# Altium PCB Tray3.PcbDoc
Units mm, origin at the board's own origin, x right, y up, seen from the top; angles counter-clockwise.
Board outline 120.02 x 29.97 mm, 2 copper layers (Top Layer, Bottom Layer); 13 components, 11 nets, 73 pads, 12 vias.
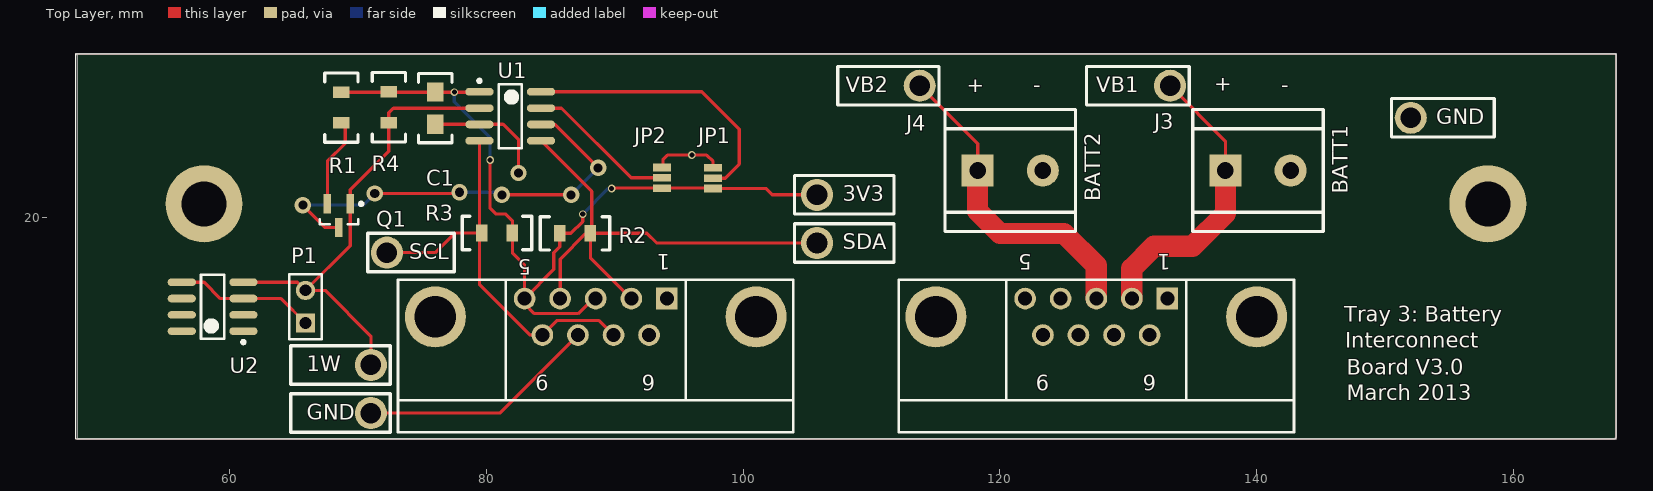
[diagram p0: Top Layer view]
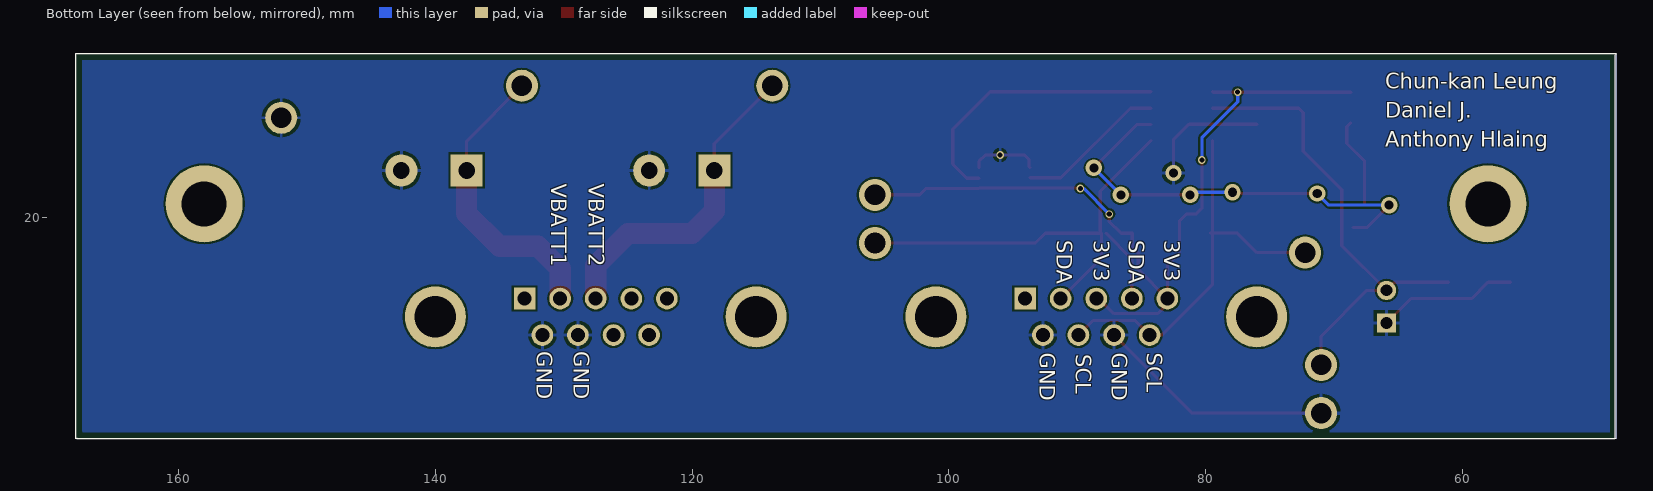
[diagram p1: Bottom Layer view, seen from below]

## Layer stack, top to bottom
Top Layer: signal copper 0.0356
Dielectric: dielectric 0.32, FR-4, Dk 4.8
Bottom Layer: signal copper 0.0356

## Board outline
48,32.722 48.127,32.595 48.127,2.75 167.888,2.75 168.015,2.877 168.015,32.722

## Design rules (kind name [scope] priority, off if disabled: settings)
Clearance [All] p1: gap=0.152
HoleSize [All] p1: absolutevalues=TRUE maxlimit=3.556 minlimit=0.025 maxpercent=80.000 minpercent=20.000
MinimumSolderMaskSliver [All] p1: minsoldermaskwidth=0.152
PolygonConnect [All] p1: connectstyle=Relief reliefconductorwidth=0.254 reliefentries=4 polygonreliefangle="90 Angle" airgapwidth=0.254
RoutingVias [All] p1: holewidth=0.711 width=1.27 viastyle="Through Hole" minholewidth=0.711 minwidth=1.27 maxholewidth=0.711 maxwidth=1.27
SilkToSilkClearance [All] p1: silktosilkclearance=0.051
SilkToSolderMaskClearance SilkscreenOverComponentPads [IsPad] p1: minsilkscreentomaskgap=0.254 clearancetoexposedcopper=TRUE
SolderMaskExpansion [All] p1: expansion=0.102
Width [All] p1: maxlimit=2.54 minlimit=0.254 preferedwidth=0.254
24 further rules are at their usual default settings.

## Classes and differential pairs
component class Designator: U2
component class Tray3: J3 J4

## Components (designator, comment, footprint, x,y, rotation, side; value= is the part's Value field where it differs from the comment)
C1 "0805 Cap" "0805 Cap" 76.012,28.505 r270 top
J3 "2 Pin terminal Block" "5.05mm Terminal Block - 2" 140.1,23.65 r0 top
J4 "2 Pin terminal Block" "5.05mm Terminal Block - 2" 120.8,23.65 r0 top
JP1 "Jumper Select" SOLDER_JUMPER_3_A 97.85,23.25 r270 top
JP2 "Jumper Select" SOLDER_JUMPER_3_A 93.875,23.275 r270 top
P1 "Header 2" HDR1X2 65.907,11.767 r90 top
Q1 "DMP2004K" DMP2004KDITR-ND 68.5,20.15 r270 top
R1 "0805 Resistor" "0805 Resistor" 68.7,28.55 r270 top
R2 "0805 Resistor" "0805 Resistor" 86.9,18.75 r0 top
R3 "0805 Resistor" "0805 Resistor" 80.825,18.775 r180 top
R4 "0603 Resistor" "0805 Resistor" 72.4,28.575 r270 top
U1 "DS24820Z+_ND" DS2482-100 81.854,27.87 r0 top
U2 "TO-92" DS18S20 58.668,13.037 r180 top

## Footprints (in the part's own frame and the unit in brackets; to place one, negate y for a bottom-side part, rotate by r counter-clockwise, add the part's x,y. Pads: shape width x height; smd on the part's side, far side on the other; paste and mask are expansions set on the pad)
"5.05mm Terminal Block - 2" [mm]
  rect 2.5x2.5 hole 1.3: 1(-2.54,0)
  round 2.5 hole 1.3: 2(2.54,0)
  silkscreen extent -5.08,-4.75 5.08,4.75
"0805 Cap" [mm] "0805 Capacitor"
  rect 1.5x1.25 smd: 1(1.25,0) 2(-1.25,0)
  silkscreen extent -2.7,-1.3 2.7,1.3, body extent -1,-0.63 1.1,0.63, height 0.9
"0805 Resistor" [mm] "0805 Resistor"
  rect 0.9x1.3 smd: 1(1.2,0) 2(-1.2,0)
  silkscreen extent -2.7,-1.3 2.7,1.3, body extent -1,-0.63 1.1,0.63, height 0.6
DMP2004KDITR-ND [mm] "SOT23, 3-Leads, Body 3.0x2.5mm (max), Pitch 0.89mm, IPC Medium Density"
  rect 1.5x0.6 smd: 1(-0.9,0.89) 2(-0.9,-0.89) 3(0.951,0)
  silkscreen extent -1.02,-1.5 0.7,1.87, body extent -0.7,-1.5 0.7,1.5, height 1.2
DS18S20 [mm] "SOIC, 8-Leads, Body 5.0x4.0mm (max), Pitch 1.27mm, IPC Medium Density"
  oval 2.2x0.6 smd: 1(-2.4,1.905) 2(-2.4,0.635) 3(-2.4,-0.635) 4(-2.4,-1.905) 5(2.4,-1.905) 6(2.4,-0.635) 7(2.4,0.635) 8(2.4,1.905)
  silkscreen extent -2.53,-2.5 0.9,2.88, body extent -2,-2.5 2,2.5, height 1.75
DS2482-100 [mm] "SOIC, 8-Leads, Body 5.0x4.0mm (max), Pitch 1.27mm, IPC Medium Density"
  oval 2.2x0.6 smd: 1(-2.4,1.905) 2(-2.4,0.635) 3(-2.4,-0.635) 4(-2.4,-1.905) 5(2.4,-1.905) 6(2.4,-0.635) 7(2.4,0.635) 8(2.4,1.905)
  silkscreen extent -2.52,-2.5 0.9,2.88, body extent -2,-2.5 2,2.5, height 1.75
HDR1X2 [mm] "Connector; Header; 2 Position"
  rect 1.5x1.5 hole 0.9: 1(0,0)
  round 1.5 hole 0.9: 2(2.54,0)
  silkscreen extent -1.27,-1.27 3.81,1.27
SOLDER_JUMPER_3_A [mm]
  rect 0.6x1.4 smd: 1(1,-0.2) 2(0.2,-0.2) 3(-0.6,-0.2)

## Part data
C1: library part "0805 MLCC - X7R, 10%", "0805 MLCC - X7R, 10%"
J3 J4: library part "2 Terminal Block"
JP1 JP2: library part "Header 3", "Header, 3-Pin"
P1: "Header, 2-Pin"
Q1: "MOSFET P-CH 20V 600MA SOT23-3"
R1 R2 R3: library part "0805 Thick Film Resistor 1%", "0805 Thick Film Resistor 1%"
R4: library part "0603 Thick Film Resistor 1%", "0603 Thick Film Resistor 1%"
U2: library part DS18S20

## Free pads (board coordinates)
  rect 1.69x1.69 hole 1.09: 1(94.053,13.67) 1(133.042,13.67)
  round 1.69 hole 1.09: 2(91.283,13.67) 2(130.272,13.67) 3(88.513,13.67) 3(127.502,13.67) 4(85.743,13.67) 4(124.732,13.67) 5(82.973,13.67) 5(121.962,13.67) 6(92.668,10.83) 6(131.657,10.83) 7(89.898,10.83) 7(128.887,10.83) 8(87.128,10.83) 8(126.117,10.83) 9(84.358,10.83) 9(123.347,10.83)
  round 2.5 hole 1.6: 2(105.75,21.75) TP_GND(71,4.75) TP_GND2(152,27.75) TP_OW(71,8.5) TP_SCL(72.25,17.25) TP_SDA(105.75,18) TP_VBATT1(133.25,30.25) TP_VBATT2(113.75,30.25)
  round 4.76 hole 3.26: 10(101.008,12.25) 10(139.997,12.25) 11(76.018,12.25) 11(115.007,12.25)
  round 6 hole 3.5 mask+0.102: MP0(58,21.05)
  round 6 hole 3.5: MP1(158,21.05)

## Via types
v1: diameter 1.27, hole 0.711, Top Layer to Bottom Layer, 7 vias
v2: diameter 0.6, hole 0.4, Top Layer to Bottom Layer, 5 vias

## Nets (pads, with @x,y where several pads share a name; then routed paths per layer and width w, separated by ;. In a path a pad name is that pad's centre, name@x,y a point inside that pad or via, vN(x,y) a via of type N, cw(c..) or ccw(c..) an arc to the next point about the centre after c; other vN are vias at no path point)
3V3: C1.2 JP1.1 JP2.1 pad.2@105.75,21.75 pad.3@88.513,13.67 pad.5@82.973,13.67 R1.2 R2.2 R3.2 R4.2 U1.1 | length 64.6
  Top Layer w0.254: R1.2 v2(77.5,29.75) 79.429,29.75 U1.1 ; v2(80.286,24.464) 80.286,20.714 80.75,20.25 81.5,20.25 82.025,19.725 R3.2 82.025,17.225 82.973,16.277 pad.5@82.973,13.67 ; v2(87.5,20.25) 87.5,19.671 86.579,18.75 R2.2 85.7,17.7 85.25,17.25 85.25,15.947 pad.5@82.973,13.67 ; pad.3@88.513,13.67 88.309,13.67 87.139,12.5 83.737,12.5 82.973,13.264 pad.5@82.973,13.67 ; v2(89.75,22.25) 89.775,22.275 JP2.1 97.625,22.275 JP1.1 101.75,22.25 102.25,21.75 pad.2@105.75,21.75
  Bottom Layer w0.254: v2(77.5,29.75) 77.5,29 80.286,26.214 v2(80.286,24.464) ; v2(87.5,20.25) 89.5,22.25 v2(89.75,22.25)
GND: C1.1 J3.2 J4.2 JP1.3 JP2.3 P1.1 pad.6 pad.7@128.887,10.83 pad.8@87.128,10.83 pad.TP_GND pad.TP_GND2 U1.3 U2.3 U2.5 | length 44.6
  Top Layer w0.254: U2.5 58.008,14.942 59.278,13.672 U2.3 64.002,13.672 P1.1 ; pad.TP_GND 81.048,4.75 pad.8@87.128,10.83 ; C1.1 81.295,27.255 82.5,26.05 v1(82.5,23.45) ; JP2.3 93.75,23.95 93.75,24.5 94.1,24.85 v2(96,24.85) 97.15,24.85 97.65,24.35 JP1.3
NetJP1_2: JP1.2 U1.8 | length 21.9
  Top Layer w0.254: U1.8 96.775,29.775 99.7,26.85 99.7,24.15 98.6,23.05 JP1.2
NetJP2_2: JP2.2 U1.7 | length 11.7
  Top Layer w0.254: U1.7 85.845,28.505 91.275,23.075 JP2.2
NetQ1_2: Q1.2 R1.1 | length 7
  Top Layer w0.254: Q1.2 67.61,24.36 69,25.75 69,27.05 R1.1
NetQ1_3: Q1.3 U1.6 | length 33.6
  Top Layer w0.254: v1(65.7,20.95) 67.451,19.199 Q1.3 ; v1(71.3,21.85) 77.8,21.85 v1(77.9,21.95) ; v1(81.2,21.75) v1(86.6,21.75) ; U1.6 85.315,27.235 v1(88.7,23.85)
  Bottom Layer w0.254: v1(65.7,20.95) 70.4,20.95 v1(71.3,21.85) ; v1(77.9,21.95) 81,21.95 v1(81.2,21.75) ; v1@86.7,21.85 v1(88.7,23.85)
ONEWIRE: P1.2 pad.TP_OW Q1.1 R4.1 U1.2 U2.4 | length 37.7
  Top Layer w0.254: U2.4 65.272,14.942 P1.2 ; pad.TP_OW 71,10.75 67.443,14.307 P1.2 ; U1.2 72.755,28.505 72.4,28.15 R4.1 72.4,25.15 69.39,22.14 Q1.1 69.39,17.79 P1.2
SCL_TELEM_BATT: pad.7@89.898,10.83 pad.9@84.358,10.83 pad.TP_SCL R3.1 U1.4 | length 32.2
  Top Layer w0.254: pad.TP_SCL 76,17.25 77.525,18.775 R3.1@79.454,18.775 ; U1.4 R3.1@79.454,18.775 ; R3.1 R3.1@79.454,18.775 ; pad.7@89.898,10.83 88.774,11.954 85.482,11.954 84.358,10.83 83.42,10.83 79.454,14.796 R3.1@79.454,18.775
SDA_TELEM_BATT: pad.2@91.283,13.67 pad.4@85.743,13.67 pad.TP_SDA R2.1 U1.5 | length 39.2
  Top Layer w0.254: U1.5 88.2,22.019 88.2,18.85 R2.1@88.3,18.75 ; pad.4@85.743,13.67 85.743,16.743 R2.1@87.75,18.75 ; pad.2@91.283,13.67 88.1,16.853 R2.1 R2.1@88.3,18.75 ; pad.TP_SDA 93.25,18 92.5,18.75 R2.1@88.3,18.75
VBATT1: J3.1 pad.2@130.272,13.67 pad.TP_VBATT1 | length 23.1
  Top Layer w0.254: pad.TP_VBATT1 137.56,25.94 J3.1
  Top Layer w1.651: pad.2@130.272,13.67 130.272,16.022 132,17.75 135,17.75 137.56,20.31 J3.1
VBATT2: J4.1 pad.3@127.502,13.67 pad.TP_VBATT2 | length 25.2
  Top Layer w0.254: pad.TP_VBATT2 118.26,25.74 J4.1
  Top Layer w1.651: J4.1 118.26,20.49 120,18.75 125,18.75 127.502,16.248 pad.3@127.502,13.67
pads on no net: U2.1 U2.2 U2.6 U2.7 U2.8
copper on no net: | length 600
  Top Layer w0.025: 48,2.75 48,32.75 168,32.75 168,2.75 48,2.75
  Bottom Layer w0.025: 48,2.75 168,2.75 168,32.75 48,32.75 48,2.75

## Polygon pours and split planes (outlines as drawn)
GND on Bottom Layer "GND " (solid, pour order 2): 167.5,3.25 167.5,32.25 48.5,32.25 48.5,3.274 167.45,3.274 167.475,3.25

## Silkscreen, mask and mechanical layers (free items; w line width, h text height)
Top Overlay:
  lines w0.025: 48,2.75 168,2.75 168,32.75 48,32.75 48,2.75
  lines w0.2: 73.113,5.75 103.913,5.75 ; 81.513,5.75 81.513,15.15 ; 95.513,5.75 95.513,15.15 ; 112.102,5.75 142.902,5.75 ; 120.502,5.75 120.502,15.15 ; 134.502,5.75 134.502,15.15 ; 73.113,3.25 103.913,3.25 103.913,15.15 73.113,15.15 73.113,3.25 ; 112.102,3.25 142.902,3.25 142.902,15.15 112.102,15.15 112.102,3.25
  lines w0.254: 64.75,3.25 72.5,3.25 72.5,6.25 64.75,6.25 64.75,3.25 ; 64.75,7 72.5,7 72.5,10 64.75,10 64.75,7 ; 70.75,15.75 70.75,18.75 77.5,18.75 77.5,15.75 70.75,15.75 ; 104,16.5 111.75,16.5 111.75,19.5 104,19.5 104,16.5 ; 104,20.25 104,23.25 111.75,23.25 111.75,20.25 104,20.25 ; 107.375,28.75 107.375,31.75 115.25,31.75 115.25,28.75 107.375,28.75 ; 126.75,28.75 126.75,31.75 134.75,31.75 134.75,28.75 126.75,28.75 ; 150.5,26.25 158.5,26.25 158.5,29.25 150.5,29.25 150.5,26.25
  text "+" at 136.7,29.85 h1.2
  text "VB2" at 108,29.75 h1.2
  text "+" at 117.4,29.75 h1.2
  text "-" at 122.6,29.75 h1.2
  text "VB1" at 127.5,29.75 h1.2
  text "-" at 141.9,29.75 h1.2
  text "GND" at 154,27.25 h1.2
  text "BATT1" at 147.1,21.85 h1.2 r90
  text "3V3" at 107.75,21.25 h1.2
  text "BATT2" at 127.8,21.25 h1.2 r90
  text "SDA" at 107.75,17.5 h1.2
  text "1" at 94.303,17.125 h1.2 r180
  text "5" at 122.462,17.125 h1.2 r180
  text "1" at 133.292,17.125 h1.2 r180
  text "SCL" at 74,16.75 h1.2
  text "5" at 83.5,16.75 h1.2 r180
  text "Tray 3: Battery" at 146.8,11.85 h1.2
  text "Interconnect" at 146.9,9.85 h1.2
  text "1W" at 66,8 h1.2
  text "Board V3.0" at 147,7.75 h1.2
  text "9" at 84.858,7.725 h1.2 r180
  text "6" at 93.168,7.725 h1.2 r180
  text "9" at 123.847,7.725 h1.2 r180
  text "6" at 132.157,7.725 h1.2 r180
  text "March 2013" at 147,5.75 h1.2
  text "GND" at 66,4.25 h1.2
Bottom Overlay:
  lines w0.025: 48,2.75 168,2.75 168,32.75 48,32.75 48,2.75
  text "Chun-kan Leung" at 66,30 h1.2
  text "Daniel J." at 66,27.75 h1.2
  text "Anthony Hlaing" at 66,25.5 h1.2
  text "VBATT2" at 128.05,22.6 h1.2 r90
  text "VBATT1" at 130.95,22.6 h1.2 r90
  text "3V3" at 83.199,18.201 h1.2 r90
  text "SDA" at 85.999,18.201 h1.2 r90
  text "3V3" at 88.699,18.201 h1.2 r90
  text "SDA" at 91.599,18.201 h1.2 r90
  text "GND" at 129.2,9.55 h1.2 r90
  text "GND" at 132.1,9.55 h1.2 r90
  text "SCL" at 84.6,9.45 h1.2 r90
  text "GND" at 87.3,9.45 h1.2 r90
  text "GND" at 92.9,9.45 h1.2 r90
  text "SCL" at 90.1,9.35 h1.2 r90
Top Solder:
  lines w0.025: 48,2.75 168,2.75 168,32.75 48,32.75 48,2.75
Bottom Solder:
  lines w0.025: 48,2.75 168,2.75 168,32.75 48,32.75 48,2.75